# EAGLE board schematic (EAGLE 8.3.1)
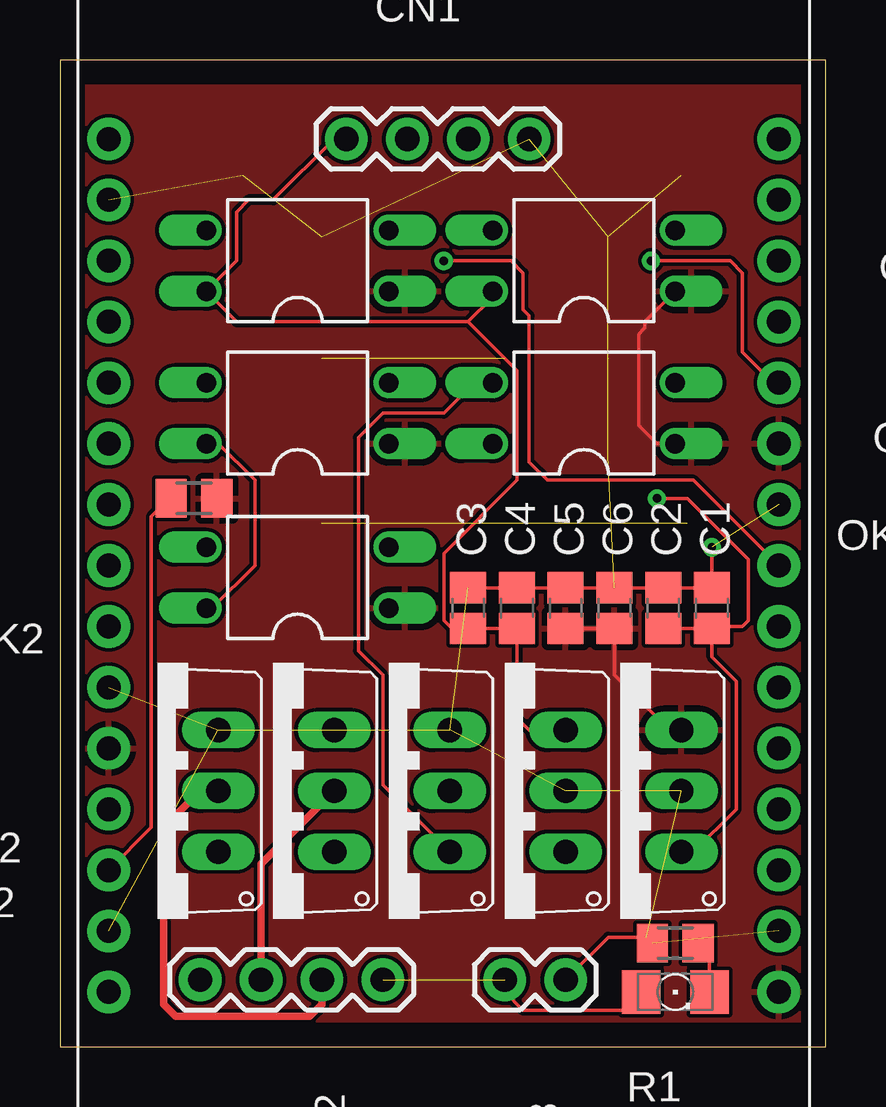
[diagram p0: board, top side]
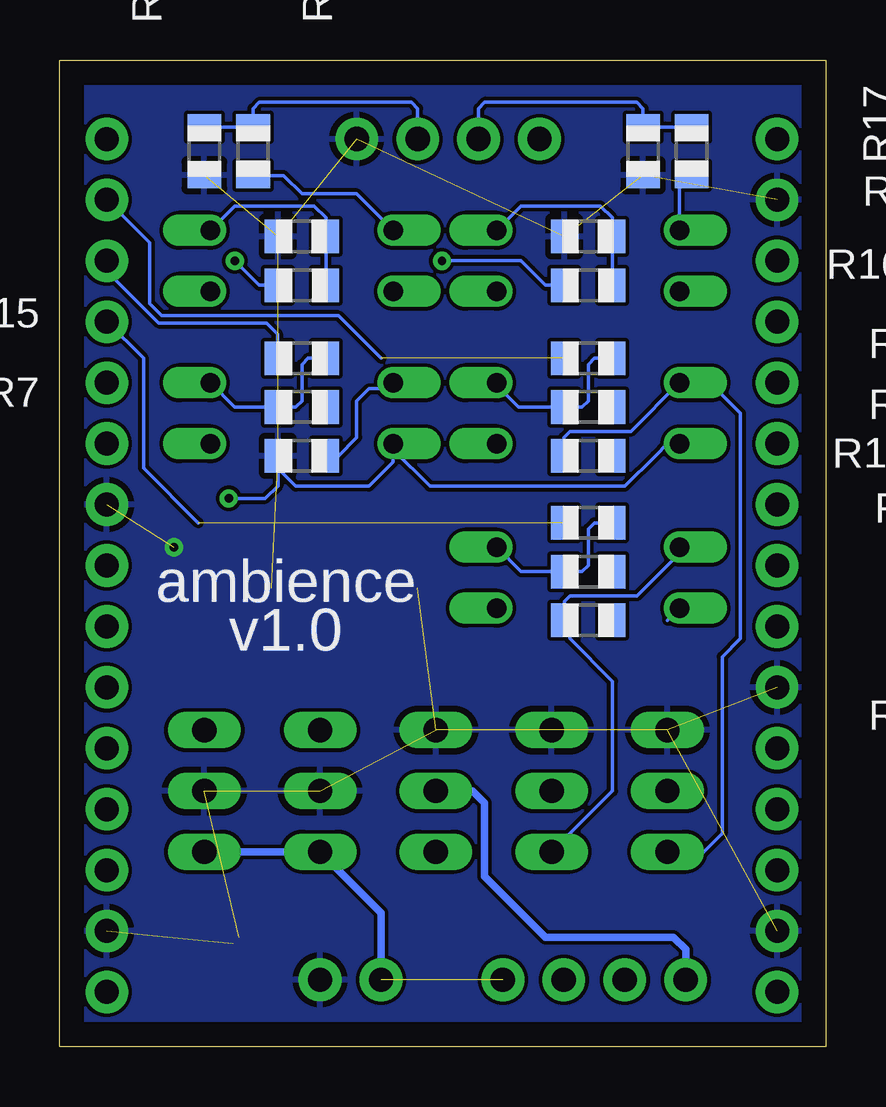
[diagram p1: board, bottom side, seen from below]

Size 31.93 x 41.14 mm. Coordinates in mm from the lower left corner, seen from the top.
Outline: 0,0 31.93,0 31.93,41.14 0,41.14 0,0
Copper layers (1*16): Top 0.035mm / dielectric 1.5mm / Bottom 0.035mm
Design rules "default": minimum track width 6mil, minimum drill 0.35mm, track to track 6mil, track to pad 6mil, pad to pad 6mil, via to via 6mil, smd to smd 6mil, copper to edge 40mil, drill to drill 6mil, minimum pad ring 10mil, minimum via ring 8mil, stop-mask expansion 4mil, vias tented up to drill 0mil, thermal gap 10mil

## Footprints (pad centres in the part's own frame; a part is rotated, then mirrored left to right if it is on the bottom)
C0805 = smd 1.3 x 1.5: 1 -0.85,0; 2 0.85,0
1X04-BIG = drill 1.016 pad 1.778: 1 0,0; 2 2.54,0; 3 5.08,0; 4 7.62,0
TO220V = drill 1.016 long: 1 -2.54,-2.54; 2 0,-2.54; 3 2.54,-2.54
1206 = smd 1.6 x 1.803: A -1.422,0; C 1.422,0
DIL04 = drill 0.813 offset: 1 -1.27,-3.81; 2 1.27,-3.81; 3 1.27,3.81; 4 -1.27,3.81
M0805 = smd 1.3 x 1.6: 1 -0.95,0; 2 0.95,0
R0805 = smd 1.1 x 1.4: 1 -1,0; 2 1,0
ESP8266-NODEMCU = drill 1 pad 1.778: P$1 0,0; P$2 0,-2.54; P$3 0,-5.08; P$4 0,-7.62; P$5 0,-10.16; P$6 0,-12.7; P$7 0,-15.24; P$8 0,-17.78; P$9 0,-20.32; P$10 0,-22.86; P$11 0,-25.4; P$12 0,-27.94; P$13 0,-30.48; P$14 0,-33.02; P$15 0,-35.56; P$16 27.94,-35.56; P$17 27.94,-33.02; P$18 27.94,-30.48; P$19 27.94,-27.94; P$20 27.94,-25.4; P$21 27.94,-22.86; P$22 27.94,-20.32; P$23 27.94,-17.78; P$24 27.94,-15.24; P$25 27.94,-12.7; P$26 27.94,-10.16; P$27 27.94,-7.62; P$28 27.94,-5.08; P$29 27.94,-2.54; P$30 27.94,0
HEADER-2X1 = drill 1.016 pad 1.778: 1 0,0; 2 2.54,0

## Placement (x,y rotation side)
C1  [C0805]  27.18,18.29 90 top
C2  [C0805]  25.15,18.29 90 top
C3  [C0805]  17.02,18.29 90 top
C4  [C0805]  19.05,18.29 90 top
C5  [C0805]  21.08,18.29 90 top
C6  [C0805]  23.11,18.29 90 top
CN1  1X4-BIG  [1X04-BIG]  11.94,37.85 0 top
CN2  1X4-BIG  [1X04-BIG]  5.84,2.79 0 top
IC3  78TO220  [TO220V]  18.54,10.67 90 top
IC4  78TO220  [TO220V]  23.37,10.67 90 top
LED1  [1206]  25.65,2.29 0 top
OK1  PC817  [DIL04]  21.84,26.42 90 top
OK2  PC817  [DIL04]  9.91,19.56 90 top
OK3  PC817  [DIL04]  9.91,26.42 90 top
OK4  PC817  [DIL04]  9.91,32.77 90 top
OK5  PC817  [DIL04]  21.84,32.77 90 top
Q1  [TO220V]  4.06,10.67 90 top
Q2  [TO220V]  8.89,10.67 90 top
Q3  [TO220V]  13.72,10.67 90 top
R1  [M0805]  25.65,4.32 180 top
R2  [R0805]  21.84,26.67 180 bottom
R3  [R0805]  9.91,19.81 180 bottom
R4  [R0805]  9.91,26.67 180 bottom
R5  [R0805]  9.91,28.7 180 bottom
R6  [R0805]  9.91,21.84 180 bottom
R7  [R0805]  21.84,28.7 180 bottom
R8  [R0805]  9.91,17.78 180 bottom
R9  [R0805]  21.84,24.64 0 bottom
R10  [R0805]  9.91,24.64 180 bottom
R11  [R0805]  21.84,33.78 0 bottom
R12  [R0805]  9.91,33.78 0 bottom
R13  [R0805]  5.59,37.34 270 bottom
R14  [R0805]  23.88,37.34 270 bottom
R15  [R0805]  21.84,31.75 180 bottom
R16  [R0805]  9.91,31.75 180 bottom
R17  [R0805]  7.62,37.34 90 bottom
R18  [R0805]  25.91,37.34 90 bottom
R19  [M0805]  5.59,22.86 180 top
U$1  ESP8266  [ESP8266-NODEMCU]  2.03,37.85 0 top
U$2  HEADER-2X1  [HEADER-2X1]  18.54,2.79 0 top

## Library data of the parts
C1-C6 CN1 CN2 IC3 IC4 LED1 Q1-Q3 R1-R19 = adafruit
OK1-OK5 = optocoupler; MPN: PC817X4J000F; OC_FARNELL: 9707727; OC_NEWARK: 97K7059
U$1 U$2 = z-lib

## Nets
+3V3: C5.1 C6.1 IC4.3 OK1.1 OK2.1 OK3.1 OK4.1 OK5.1 R19.1 U$1.P$11 U$1.P$16 U$1.P$25
+5V: C3.1 C4.1 CN1.1 IC3.3 OK4.4 OK5.4
+12V: C1.1 C2.1 CN2.4 IC3.1 IC4.1 LED1.A OK1.4 OK2.4 OK3.4 U$2.1
CTRL_A_3V3: R16.2 U$1.P$23
CTRL_A_5V: CN1.2 R13.1 R17.2
CTRL_B: R5.2 U$1.P$29
CTRL_B_3V3: R15.2 U$1.P$26
CTRL_B_5V: CN1.3 R14.1 R18.2
CTRL_G: R6.2 U$1.P$27
CTRL_R: R7.2 U$1.P$28
GND: C1.2 C2.2 C3.2 C4.2 C5.2 C6.2 CN1.4 IC3.2 IC4.2 Q1.3 Q2.3 Q3.3 R1.2 R9.1 R11.1 R12.1 R17.1 R18.1 U$1.P$2 U$1.P$10 U$1.P$14 U$1.P$17 U$1.P$24 U$2.2
N$1: OK1.2 R2.2 R7.1
N$2: LED1.C R1.1
N$3: OK2.2 R3.2 R6.1
N$4: OK3.2 R4.2 R5.1
N$5: OK3.3 Q1.1 R10.2
N$6: OK2.3 Q2.1 R8.2
N$7: OK1.3 Q3.1 R9.2
N$8: R19.2 U$1.P$13
N$9: OK5.3 R14.2
N$10: OK5.2 R11.2 R15.1
N$11: OK4.2 R12.2 R16.1
N$12: OK4.3 R13.2
POW_B: CN2.3 Q1.2
POW_G: CN2.2 Q2.2
POW_R: CN2.1 Q3.2

## Tracks (layer width: path | path; a pad name or v marks a point on that pad's centre or on a via)
+3V3
  Top 0.152: IC4.3 25.4,13.21 23.11,15.49 C6.1 C5.1 | OK5.1 24.38,30.23 24.38,29.97 24.13,29.72 24.13,25.91 24.89,25.15 OK1.1
  pour Top: 0,0 32,0 32,41.15 0,41.15
+5V
  Top 0.152: CN1.1 11.43,37.85 8.89,35.31 7.87,35.31 7.37,34.8 7.37,32.77 OK4.4 7.37,30.23 17.02,30.23 | 17.02,30.23 18.03,31.24 OK5.4 | 17.02,30.23 19.05,28.19 19.05,23.62 16,20.57 16,17.78 16.34,17.44 C3.1 C4.1 19.05,13.72 19.56,13.21 IC3.3
+12V  (via drill 0.35)  (1 unrouted)
  Top 0.152: 27.08,17.44 C2.1 | 27.08,17.44 C1.1 27.27,17.53 28.45,17.53 28.7,17.78 28.7,20.32 26.16,22.86 v24.89,22.86 | IC4.1 26.42,8.13 28.19,9.91 28.19,15.24 27.18,16.26 27.18,17.34 27.08,17.44 | OK1.4 17.27,25.15 | OK3.4 6.6,25.15 8.13,23.62 8.13,20.07 6.35,18.29 OK2.4 | LED1.A 23.47,1.52 19.3,1.52 18.54,2.29 U$2.1
  Bottom 0.152: OK1.4 18.03,24.89 | 18.03,24.89 18.03,24.38 19.05,23.37 22.1,23.37 22.84,24.11 22.84,24.2 22.84,23.38 23.37,22.86 v24.89,22.86 | 6.6,17.78 OK2.4 | OK3.4 6.6,25.15 7.11,24.64 8.38,23.37 16.51,23.37 18.03,24.89
  Bottom 0.305: U$2.1 18.54,5.59 IC3.1 IC4.1
CTRL_A_3V3  (via drill 0.35)
  Top 0.152: v16,32.77 18.8,32.77 19.3,32.26 19.3,30.73 19.56,30.48 19.56,24.38 20.32,23.62 26.42,23.62 U$1.P$23
  Bottom 0.152: R16.2 11.68,31.75 12.7,32.77 v16,32.77
CTRL_A_5V
  Bottom 0.152: R13.1 R17.2 7.62,39.12 7.87,39.37 14.22,39.37 14.48,39.12 CN1.2
CTRL_B  (1 unrouted)
  Bottom 0.152: U$1.P$29 28.19,33.53 28.19,30.99 27.69,30.48 20.32,30.48 18.54,28.7
CTRL_B_3V3  (via drill 0.35)
  Top 0.152: U$1.P$26 29.72,27.69 28.45,28.96 28.45,32.26 27.94,32.77 v24.64,32.77
  Bottom 0.152: R15.2 23.62,31.75 v24.64,32.77
CTRL_B_5V
  Bottom 0.152: CN1.3 17.02,39.12 17.27,39.37 23.62,39.37 23.88,39.12 R14.1 R18.2
CTRL_G  (1 unrouted)
  Bottom 0.152: 26.16,21.84 28.45,24.13 28.45,28.7 U$1.P$27
CTRL_R  (1 unrouted)
  Bottom 0.152: U$1.P$28 29.97,32.34 27.81,30.17 23.32,30.17 22.86,29.72 22.86,28.72
GND  (via drill 0.35)  (17 unrouted)
  Top 0.152: C3.2 C4.2 C5.2 C6.2 C2.2 C1.2 v27.18,20.83 | U$2.2 22.86,4.57 24.45,4.57 R1.2
  pour Bottom: 0,41.15 32,41.15 32,0 0,0
N$1
  Bottom 0.152: OK1.2 24.64,26.67 R2.2 22.1,26.67 21.84,26.92 21.84,28.45 21.59,28.7 R7.1
N$2
  Top 0.152: LED1.C 27.08,3.85 R1.1
N$3
  Bottom 0.152: OK2.2 12.7,19.81 R3.2 10.16,19.81 9.91,20.07 9.91,21.59 9.65,21.84 R6.1
N$4
  Bottom 0.152: 13.72,27.57 OK3.2 | 13.72,27.57 13.72,27.43 | R5.1 9.65,28.7 9.91,28.45 9.91,26.92 10.16,26.67 R4.2 12.82,26.67 13.72,27.57
N$5
  Bottom 0.152: R10.2 10.92,24.65 10.92,25.4 10.67,25.65 8.13,25.65 OK3.3 4.83,27.69 3.56,26.42 3.56,17.02 4.32,16.26 4.32,8.89 5.08,8.13 | 5.15,8.13 5.08,8.13 | 5.08,8.13 5.15,8.13 | Q1.1 5.15,8.13
N$6
  Bottom 0.152: Q2.1 8.89,10.67 8.89,15.24 10.67,17.02 10.67,17.54 R8.2 10.91,18.56 10.67,18.8 7.87,18.8 6.35,20.32 6.35,20.57 OK2.3
N$7
  Top 0.152: OK1.3 17.27,27.69 16,26.42 13.46,26.42 12.45,25.4 12.45,16.51 13.46,15.49 13.46,10.92 Q3.1
  Bottom 0.152: R9.2 20.32,24.64 19.56,25.4 19.56,26.92 19.05,27.43 18.29,27.43 OK1.3
N$8
  Top 0.152: U$1.P$13 3.81,9.14 3.81,22.1 4.57,22.86 R19.2
N$9
  Bottom 0.152: OK5.3 19.56,35.56 21.84,35.56 22.61,36.32 23.86,36.32 R14.2
N$10
  Bottom 0.152: R15.1 R11.2 20.84,34.56 21.34,35.05 24.64,35.05 OK5.2
N$11
  Bottom 0.152: R16.1 R12.2 8.91,34.56 9.4,35.05 12.7,35.05 OK4.2
N$12
  Bottom 0.152: OK4.3 6.1,35.83 R13.2
POW_B
  Top 0.305: Q1.2 5.84,10.67 4.32,9.14 4.32,1.78 4.83,1.27 10.41,1.27 10.92,1.78 CN2.3
POW_G
  Top 0.305: CN2.2 8.38,7.62 Q2.2
POW_R
  Bottom 0.152: Q3.2 15.76,10.67
  Bottom 0.305: 16,10.67 15.76,10.67 14.73,10.67 14.22,10.16 14.22,7.11 11.68,4.57 6.35,4.57 5.84,4.06 CN2.1

## Text on the board
bPlace: ambience | v1.0